# Altium PCB LocalKill.PcbDoc
Units mil, origin at the board's own origin, x right, y up, seen from the top; angles counter-clockwise.
Board outline 5000 x 3500 mil, 4 copper layers (Top Layer, Internal Plane 1, Internal Plane 2, Bottom Layer), stack 30.634 mil thick; 115 components, 100 nets, 403 pads, 2 vias.
Unrouted connection lines stored in the file: 237.
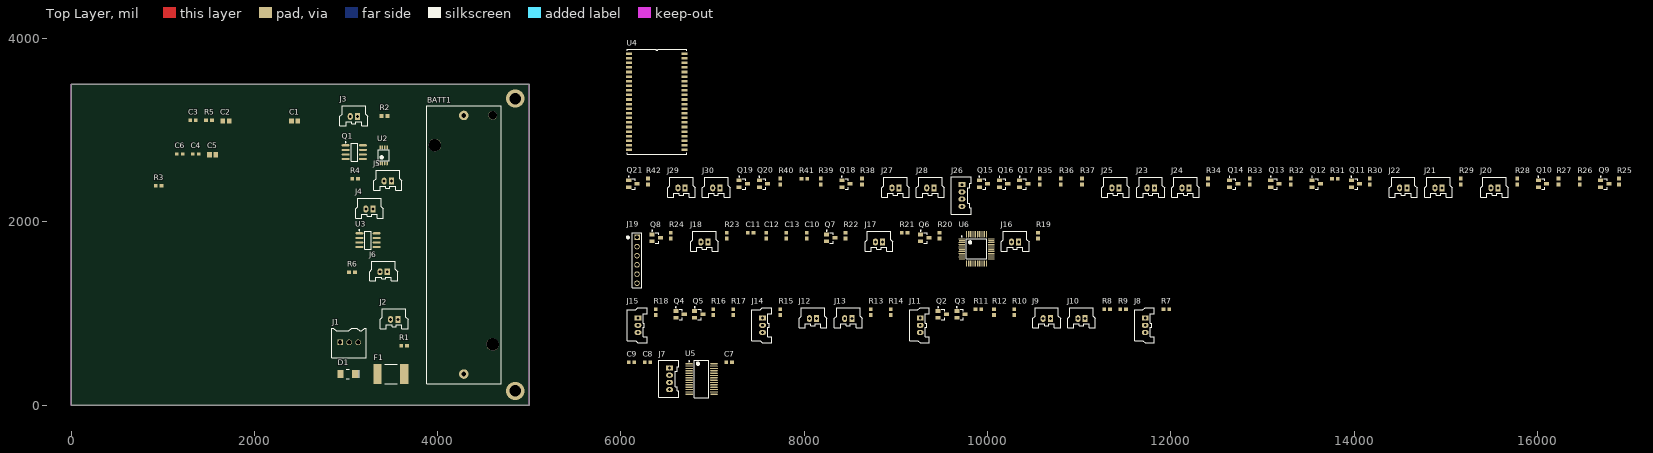
[diagram p0: Top Layer view]
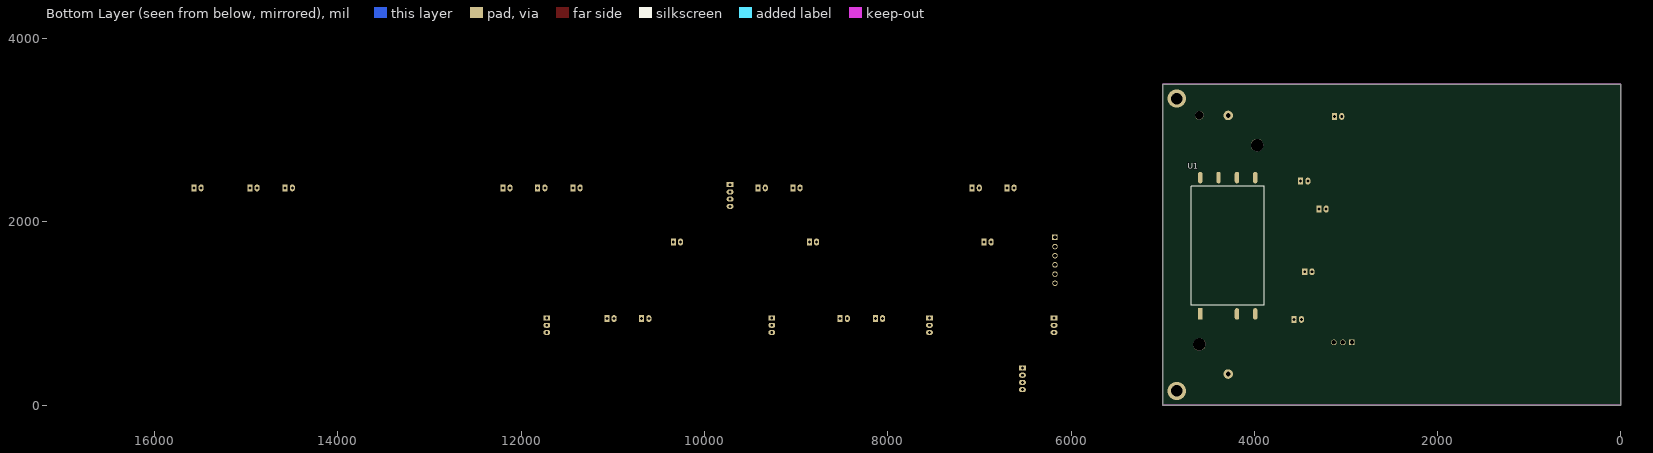
[diagram p1: Bottom Layer view, seen from below]
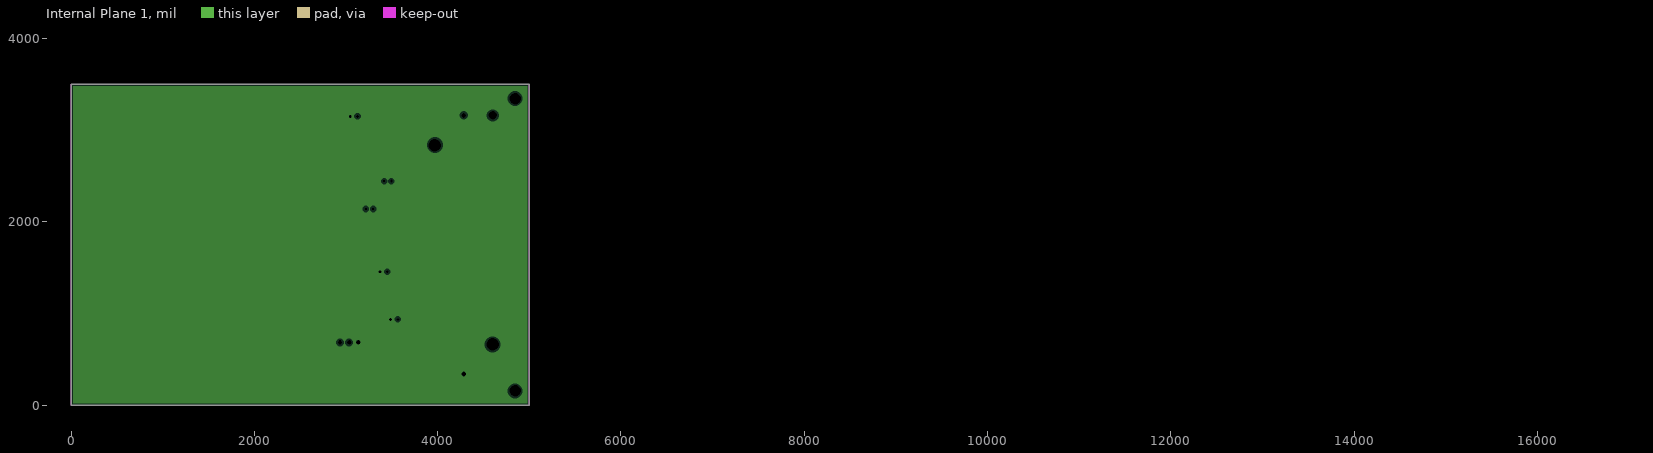
[diagram p2: Internal Plane 1, clearances drawn from the general rule]
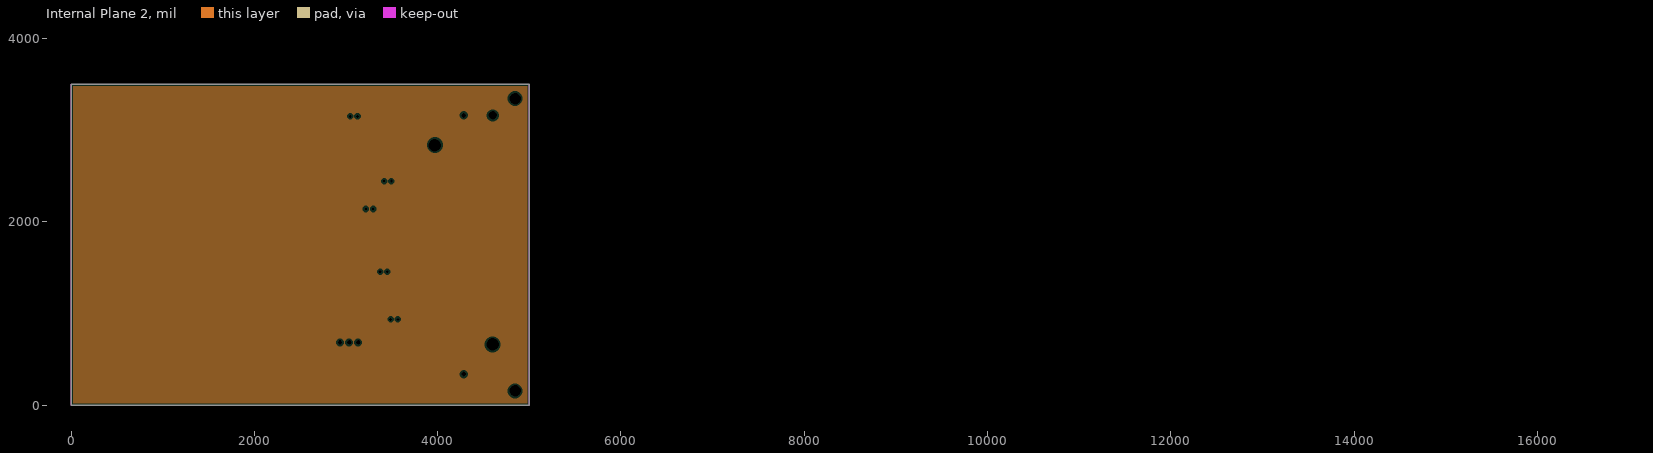
[diagram p3: Internal Plane 2, clearances drawn from the general rule]

## Layer stack, top to bottom
Top Solder: solder mask 0.4, Solder Resist, Dk 3.5
Top Layer: signal copper 1.4
Dielectric 1: core 10, FR-4, Dk 4.2
Internal Plane 1: plane copper 1.417, net GND
Dielectric 3: prepreg 5, Dk 4.2
Internal Plane 2: plane copper 1.417, net 3V3
Dielectric 2: core 10, Dk 4.2
Bottom Layer: signal copper 1.4
Bottom Solder: solder mask 0.4, Solder Resist, Dk 3.5

## Board outline
0,0 5000,0 5000,3500 0,3500

## Design rules (kind name [scope] priority, off if disabled: settings)
Clearance [All] p1: gap=7
PlaneClearance [All] p1: clearance=20
PlaneConnect [All] p1: planeconnectstyle=Relief reliefexpansion=20 reliefentries=4 reliefconductorwidth=10 reliefairgap=10
PolygonConnect [All] p1: connectstyle=Relief reliefconductorwidth=10 reliefentries=4 polygonreliefangle="90 Angle" airgapwidth=10
RoomDefinition RF [InComponentClass('RF')] p1: confinementstyle=ConfineIn formatcopy=TRUE lockcomponents=FALSE outline 6045,2725 6740,2725 6740,3995 6045,3995
RoomDefinition Power [InComponentClass('Power')] p2: confinementstyle=ConfineIn formatcopy=TRUE lockcomponents=FALSE outline 860,0 5000,0 5000,3500 860,3500
RoomDefinition Output [InComponentClass('Output')] p3: confinementstyle=ConfineIn formatcopy=TRUE lockcomponents=FALSE outline 6045,2065 17045,2065 17045,2610 6045,2610
RoomDefinition MCU [InComponentClass('MCU')] p4: confinementstyle=ConfineIn formatcopy=TRUE lockcomponents=FALSE outline 6045,1240 10695,1240 10695,2020 6045,2020
RoomDefinition Input [InComponentClass('Input')] p5: confinementstyle=ConfineIn formatcopy=TRUE lockcomponents=FALSE outline 6045,660 12020,660 12020,1185 6045,1185
RoomDefinition FTDI [InComponentClass('FTDI')] p6: confinementstyle=ConfineIn formatcopy=TRUE lockcomponents=FALSE outline 6045,60 7250,60 7250,610 6045,610
RoutingVias [All] p1: holewidth=28 width=50 viastyle="Through Hole" minholewidth=28 minwidth=50 maxholewidth=28 maxwidth=50
SolderMaskExpansion [All] p1: expansion=4
Width [All] p1: maxlimit=10 minlimit=10 preferedwidth=10
28 further rules are at their usual default settings.

## Classes and differential pairs
component class RF: U4
component class Power: BATT1 C1 C2 C3 C4 C5 C6 D1 F1 J1 J2 J3 J4 J5 J6 Q1 R1 R2 R3 R4 R5 R6 U1 U2 U3
component class Output: J20 J21 J22 J23 J24 J25 J26 J27 J28 J29 J30 Q9 Q10 Q11 Q12 Q13 Q14 Q15 Q16 Q17 Q18 Q19 Q20 Q21 R25 R26 R27 R28 R29 R30 R31 R32 R33 R34 R35 R36 R37 R38 R39 R40 R41 R42
component class MCU: C10 C11 C12 C13 J16 J17 J18 J19 Q6 Q7 Q8 R19 R20 R21 R22 R23 R24 U6
component class Input: J8 J9 J10 J11 J12 J13 J14 J15 Q2 Q3 Q4 Q5 R7 R8 R9 R10 R11 R12 R13 R14 R15 R16 R17 R18
component class FTDI: C7 C8 C9 J7 U5

## Components (designator, comment, footprint, x,y, rotation, side; value= is the part's Value field where it differs from the comment)
BATT1 "1043P" 1043P 4285,1750 r90 top
C1 "Cap" CAPC0805 2440,3100 r0 top
C2 "Cap" CAPC0805 1690,3100 r0 top
C3 "Cap" CAPC0603 1330,3110 r0 top
C4 "Cap" CAPC0603 1360,2740 r0 top
C5 "Cap" CAPC0805 1545,2730 r0 top
C6 "Cap" CAPC0603 1185,2740 r0 top
C7 "Cap" CAPC0603 7180,470 r0 top
C8 "Cap" CAPC0603 6290,470 r0 top
C9 "Cap" CAPC0603 6115,470 r0 top
C10 "Cap" CAPC0603 8025,1850 r90 top
C11 "Cap" CAPC0603 7415,1880 r0 top
C12 "Cap" CAPC0603 7585,1850 r90 top
C13 "Cap" CAPC0603 7805,1850 r90 top
D1 "VS-15MQ040NTRPBF" SS110-TP 3020,340 r180 top
F1 "PTC Fuse" PTC7451X11N 3490,340 r180 top
J1 "24V IN" MCV_0,5/3-G-2,5 2935,685 r0 top
J2 "24V OK" MOLEX-HDR-1X2-SHERLOCK-VERT 3565,935 r0 top
J3 "5V OK" MOLEX-HDR-1X2-SHERLOCK-VERT 3125,3150 r0 top
J4 "PWR SW" MOLEX-HDR-1X2-SHERLOCK-VERT 3295,2140 r0 top
J5 "CHG STAT" MOLEX-HDR-1X2-SHERLOCK-VERT 3495,2445 r0 top
J6 "3V3 OK" MOLEX-HDR-1X2-SHERLOCK-VERT 3450,1455 r0 top
J7 "USB" MOLEX-HDR-1X4-SHERLOCK-VERT 6530,405 r90 top
J8 "PORT F KILL" MOLEX-HDR-1X3-SHERLOCK-VERT 11720,950 r90 top
J9 "PORT F KILL IND" MOLEX-HDR-1X2-SHERLOCK-VERT 10685,945 r0 top
J10 "STBD F KILL IND" MOLEX-HDR-1X2-SHERLOCK-VERT 11065,945 r0 top
J11 "PORT A KILL" MOLEX-HDR-1X3-SHERLOCK-VERT 9265,950 r90 top
J12 "PORT A KILL IND" MOLEX-HDR-1X2-SHERLOCK-VERT 8135,945 r0 top
J13 "STBD A KILL IND" MOLEX-HDR-1X2-SHERLOCK-VERT 8520,945 r0 top
J14 "STBD F KILL" MOLEX-HDR-1X3-SHERLOCK-VERT 7545,950 r90 top
J15 "STBD A KILL" MOLEX-HDR-1X3-SHERLOCK-VERT 6185,950 r90 top
J16 "SYS STAT IND" MOLEX-HDR-1X2-SHERLOCK-VERT 10340,1780 r0 top
J17 "REM STAT IND" MOLEX-HDR-1X2-SHERLOCK-VERT 8855,1780 r0 top
J18 "REM KILL IND" MOLEX-HDR-1X2-SHERLOCK-VERT 6950,1780 r0 top
J19 "SWD" SWD_STM32 6175,1830 r0 top
J20 "KILL IND" MOLEX-HDR-1X2-SHERLOCK-VERT 15570,2370 r0 top
J21 "RED IND" MOLEX-HDR-1X2-SHERLOCK-VERT 14960,2370 r0 top
J22 "HORN IND" MOLEX-HDR-1X2-SHERLOCK-VERT 14575,2370 r0 top
J23 "PORT F RELAY" MOLEX-HDR-1X2-SHERLOCK-VERT 11820,2370 r0 top
J24 "STBD F RELAY" MOLEX-HDR-1X2-SHERLOCK-VERT 12200,2370 r0 top
J25 "YELLOW IND" MOLEX-HDR-1X2-SHERLOCK-VERT 11435,2370 r0 top
J26 "STACK LIGHT" MOLEX-HDR-1X4-SHERLOCK-VERT 9720,2405 r90 top
J27 "PORT A RELAY" MOLEX-HDR-1X2-SHERLOCK-VERT 9035,2370 r0 top
J28 "STBD A RELAY" MOLEX-HDR-1X2-SHERLOCK-VERT 9415,2370 r0 top
J29 "GREEN IND" MOLEX-HDR-1X2-SHERLOCK-VERT 6700,2370 r0 top
J30 "HORN RELAY" MOLEX-HDR-1X2-SHERLOCK-VERT 7080,2370 r0 top
Q1 "NDS8434" NDS8434 3090,2760 r0 top
Q2 "MMBT3904" MMBT3904 9505,990 r0 top
Q3 "MMBT3904" MMBT3904 9710,990 r0 top
Q4 "MMBT3904" MMBT3904 6645,990 r0 top
Q5 "MMBT3904" MMBT3904 6850,990 r0 top
Q6 "MMBT3904" MMBT3904 9315,1825 r0 top
Q7 "MMBT3904" MMBT3904 8290,1825 r0 top
Q8 "MMBT3904" MMBT3904 6385,1825 r0 top
Q9 "MMBT3904" MMBT3904 16735,2415 r0 top
Q10 "MMBT3904" MMBT3904 16055,2415 r0 top
Q11 "MMBT3904" MMBT3904 14015,2415 r0 top
Q12 "MMBT3904" MMBT3904 13585,2415 r0 top
Q13 "MMBT3904" MMBT3904 13135,2415 r0 top
Q14 "MMBT3904" MMBT3904 12685,2415 r0 top
Q15 "MMBT3904" MMBT3904 9955,2415 r0 top
Q16 "MMBT3904" MMBT3904 10175,2415 r0 top
Q17 "MMBT3904" MMBT3904 10395,2415 r0 top
Q18 "MMBT3904" MMBT3904 8455,2415 r0 top
Q19 "MMBT3904" MMBT3904 7335,2415 r0 top
Q20 "MMBT3904" MMBT3904 7555,2415 r0 top
Q21 "MMBT3904" MMBT3904 6130,2415 r0 top
R1 "Res" RES0603 3635,650 r0 top
R2 "Res" RES0603 3420,3155 r0 top
R3 "Res" RES0603 955,2392.5 r0 top
R4 "Res" RES0603 3100,2470 r0 top
R5 "Res" RES0603 1505,3110 r0 top
R6 "Res" RES0603 3065,1450 r0 top
R7 "Res" RES0603 11950,1045 r0 top
R8 "Res" RES0603 11305,1045 r0 top
R9 "Res" RES0603 11480,1045 r0 top
R10 "Res" RES0603 10290,1015 r90 top
R11 "Res" RES0603 9900,1045 r0 top
R12 "Res" RES0603 10070,1015 r90 top
R13 "Res" RES0603 8725,1015 r90 top
R14 "Res" RES0603 8945,1015 r90 top
R15 "Res" RES0603 7740,1015 r90 top
R16 "Res" RES0603 7005,1015 r90 top
R17 "Res" RES0603 7225,1015 r90 top
R18 "Res" RES0603 6380,1015 r90 top
R19 "Res" RES0603 10550,1850 r90 top
R20 "Res" RES0603 9475,1850 r90 top
R21 "Res" RES0603 9095,1880 r0 top
R22 "Res" RES0603 8450,1850 r90 top
R23 "Res" RES0603 7155,1850 r90 top
R24 "Res" RES0603 6545,1850 r90 top
R25 "Res" RES0603 16890,2440 r90 top
R26 "Res" RES0603 16460,2440 r90 top
R27 "Res" RES0603 16230,2440 r90 top
R28 "Res" RES0603 15780,2440 r90 top
R29 "Res" RES0603 15165,2440 r90 top
R30 "Res" RES0603 14170,2440 r90 top
R31 "Res" RES0603 13790,2470 r0 top
R32 "Res" RES0603 13310,2440 r90 top
R33 "Res" RES0603 12860,2440 r90 top
R34 "Res" RES0603 12405,2440 r90 top
R35 "Res" RES0603 10570,2440 r90 top
R36 "Res" RES0603 10800,2440 r90 top
R37 "Res" RES0603 11030,2440 r90 top
R38 "Res" RES0603 8630,2440 r90 top
R39 "Res" RES0603 8180,2440 r90 top
R40 "Res" RES0603 7740,2440 r90 top
R41 "Res" RES0603 8000,2470 r0 top
R42 "Res" RES0603 6295,2440 r90 top
U1 "CC10-2405SR-E" CC10-2405SR-E 4590,995 r90 bottom
U2 "MCP73843-4.2" MSOP-8N 3410,2725 r90 top
U3 "LT1763-3.3" 8-SOIC 3240,1800 r0 top
U4 "TRM-900-NT" TRM-900-NT 6090,3835 r0 top
U5 "FT232RL" SSOP_28_N 6880,285 r0 top
U6 "STM32F072CB" STM32F072CB 9880,1705 r0 top

## Footprints (in the part's own frame and the unit in brackets; to place one, negate y for a bottom-side part, rotate by r counter-clockwise, add the part's x,y. Pads: shape width x height; smd on the part's side, far side on the other; paste and mask are expansions set on the pad)
8-SOIC [mm] "Used for LMH6612"
  oval 2.2x0.6 smd: 1(-2.4,1.905) 2(-2.4,0.635) 3(-2.4,-0.635) 4(-2.4,-1.905) 5(2.4,-1.905) 6(2.4,-0.635) 7(2.4,0.635) 8(2.4,1.905)
  silkscreen extent -2.52,-2.5 0.9,2.88, body extent -2,-2.5 2,2.5, height 1.75
1043P [mil] "HOLDER FOR 18650 BATTERY"
  round 104 hole 52: 1(1411,0) 2(-1411,0)
  round 136 hole 136 unplated: 3(-1087.5,-315) 4(1087.5,315)
  round 94 hole 94 unplated: 5(1411,-315)
  silkscreen extent -1518,-407 1517,407, body extent -1519,-408 1515,405, height 585
CAPC0603 [mm] "Chip Capacitor, 2-Leads, Body 1.60x0.80mm, IPC Medium Density"
  rect 1x0.95 smd: 1(-0.8,0) 2(0.8,0)
  body extent -0.88,-0.48 0.87,0.48, height 0.8
CAPC0805 [mm] "Chip Capacitor, 2-Leads, Body 2.01x1.25mm, IPC Medium Density"
  rect 1.3x1.5 smd: 1(-0.875,0) 2(0.875,0)
  body extent -1.1,-0.72 1.11,0.72, height 1.8
CC10-2405SR-E [mm] "CONV DC/DC 10W SNGL 24V 5V SMD"
  rect 3.2x1.2 smd: 1(0,0)
  oval 3.2x1.2 smd: 2(0,-10.16) 3(0,-15.24) 4(37.8,-15.24) 5(37.8,-10.16) 6(37.8,-5.08) 7(37.8,0)
  silkscreen extent 2.43,-17.78 35.37,2.54, body extent -0.58,-18.87 38.28,3.73, height 6.9
MCV_0,5/3-G-2,5 [mil] "CONN TERM BLOCK 2.50MM 3POS"
  rect 60x60 hole 47.24: 1(0,0)
  round 60 hole 47.24: 2(98.43,0) 3(196.85,0)
  silkscreen extent -90,-167 286,156, body extent -87,-165 283,154, height 398
MMBT3904 [mm] "SOT23, 3-Leads, Body 2.92x2.40mm, Pitch 0.95mm, IPC Medium Density"
  rect 1.4x1 smd: B(-1.15,0.95) C(1.15,0) E(-1.15,-0.95)
  silkscreen extent -1.27,-1.45 0.65,2.12, body extent -0.65,-1.46 0.65,1.46, height 1.2
MOLEX-HDR-1X2-SHERLOCK-VERT [mm]
  rect 1.397x1.905 hole 0.8: 1(0,0)
  oval 1.397x1.905 hole 0.8: 2(-2,0)
  silkscreen extent -4.85,-2.55 2.85,2.95, body extent -4.87,-2.59 2.83,2.96, height 8.5
MOLEX-HDR-1X3-SHERLOCK-VERT [mm]
  rect 1.397x1.905 hole 0.8: 1(0,0)
  oval 1.397x1.905 hole 0.8: 2(-2,0) 3(-4,0)
  silkscreen extent -6.85,-2.55 2.85,2.95, body extent -6.88,-2.57 2.82,2.98, height 8.57
MOLEX-HDR-1X4-SHERLOCK-VERT [mm]
  rect 1.397x1.905 hole 0.8: 1(0,0)
  oval 1.397x1.905 hole 0.8: 2(-2,0) 3(-4,0) 4(-6,0)
  silkscreen extent -8.15,-2.55 2.15,2.95, body extent -8.13,-2.57 2.17,2.98, height 8.5
MSOP-8N [mm] "LT1767"
  oval 1.1x0.45 smd: 1(-2.2,0.975) 2(-2.2,0.325) 3(-2.2,-0.325) 4(-2.2,-0.975) 5(2.2,-0.975) 6(2.2,-0.325) 7(2.2,0.325) 8(2.2,0.975)
  silkscreen extent -2.32,-1.55 1.55,1.87, body extent -1.55,-1.55 1.55,1.55, height 1.1
NDS8434 [mm] "MOSFET P-CH 20V 6.5A 8-SOIC"
  oval 2.2x0.6 smd: D(-2.4,-1.905) D(-2.4,-0.635) D(-2.4,0.635) D(-2.4,1.905) G(2.4,1.905) S(2.4,-1.905) S(2.4,-0.635) S(2.4,0.635)
  silkscreen extent -2.52,-2.5 0.9,2.88, body extent -2,-2.5 2,2.5, height 1.75
PTC7451X11N [mm] "Chip PTC, 2920, 7351 metric 2-Leads, Body 7.36x5.12mm, IPC Medium Density"
  rect 2.3x5.6 smd: 1(-3.7,0) 2(3.7,0)
  silkscreen extent -1.75,-2.7 1.75,2.7, body extent -3.99,-2.72 3.99,2.72, height 1.15
RES0603 [mm] "Chip Resistor, 2-Leads, Body 1.60x0.80mm, IPC Medium Density"
  rect 1.05x1 smd: 1(-0.8,0) 2(0.8,0)
  body extent -0.88,-0.48 0.87,0.47, height 0.8
SS110-TP [mil] "DIODE SCHOTTKY 100V 1A SMA"
  rect 70x85 smd: A(80,0) C(-80,0)
  silkscreen extent -127,-53 18,53, body extent -84,-52 84,52, height 116
SSOP_28_N [mm] "For FT232RL-Tube"
  oval 2.1x0.35 smd: 1(-3.475,4.225) 2(-3.475,3.575) 3(-3.475,2.925) 4(-3.475,2.275) 5(-3.475,1.625) 6(-3.475,0.975) 7(-3.475,0.325) 8(-3.475,-0.325) 9(-3.475,-0.975) 10(-3.475,-1.625) 11(-3.475,-2.275) 12(-3.475,-2.925) 13(-3.475,-3.575) 14(-3.475,-4.225) 15(3.425,-4.225) 16(3.425,-3.575) 17(3.425,-2.925) 18(3.425,-2.275) 19(3.425,-1.625) 20(3.425,-0.975) 21(3.425,-0.325) 22(3.425,0.325) 23(3.425,0.975) 24(3.425,1.625) 25(3.425,2.275) 26(3.425,2.925) 27(3.425,3.575) 28(3.425,4.225)
  silkscreen extent -3.6,-5.25 1.97,5.25, body extent -2.83,-5.25 2.77,5.25, height 2
STM32F072CB [mm] "TSQFP, 48-Leads, Body 7.00x7.00mm, Pitch 0.50mm, IPC Medium Density"
  oval 1.75x0.3 smd: 1(-4.075,2.75) 2(-4.075,2.25) 3(-4.075,1.75) 4(-4.075,1.25) 5(-4.075,0.75) 6(-4.075,0.25) 7(-4.075,-0.25) 8(-4.075,-0.75) 9(-4.075,-1.25) 10(-4.075,-1.75) 11(-4.075,-2.25) 12(-4.075,-2.75) 25(4.075,-2.75) 26(4.075,-2.25) 27(4.075,-1.75) 28(4.075,-1.25) 29(4.075,-0.75) 30(4.075,-0.25) 31(4.075,0.25) 32(4.075,0.75) 33(4.075,1.25) 34(4.075,1.75) 35(4.075,2.25) 36(4.075,2.75)
  oval 0.3x1.75 smd: 13(-2.75,-4.075) 14(-2.25,-4.075) 15(-1.75,-4.075) 16(-1.25,-4.075) 17(-0.75,-4.075) 18(-0.25,-4.075) 19(0.25,-4.075) 20(0.75,-4.075) 21(1.25,-4.075) 22(1.75,-4.075) 23(2.25,-4.075) 24(2.75,-4.075) 37(2.75,4.075) 38(2.25,4.075) 39(1.75,4.075) 40(1.25,4.075) 41(0.75,4.075) 42(0.25,4.075) 43(-0.25,4.075) 44(-0.75,4.075) 45(-1.25,4.075) 46(-1.75,4.075) 47(-2.25,4.075) 48(-2.75,4.075)
  silkscreen extent -4.2,-2.8 2.8,3.57, body extent -3.5,-3.5 3.5,3.5, height 1.6
SWD_STM32 [mil] "SWD connector matching the pinout on STM Discovery Boards"
  rect 60x60 hole 39.37: 1(0,0)
  round 60 hole 39.37: 2(0,-100) 3(0,-200) 4(0,-300) 5(0,-400) 6(0,-500)
  silkscreen extent -110,-550 50,50
TRM-900-NT [mil] "RF TXRX MODULE ISM<1GHZ"
  rect 65x28 smd: 1(0,0) 2(0,-50) 3(0,-100) 4(0,-150) 5(0,-200) 6(0,-250) 7(0,-300) 8(0,-350) 9(0,-400) 10(0,-450) 11(0,-500) 12(0,-550) 13(0,-600) 14(0,-650) 15(0,-700) 16(0,-750) 17(0,-800) 18(0,-850) 19(0,-900) 20(0,-950) 21(0,-1000) 22(0,-1050) 23(605,-1050) 24(605,-1000) 25(605,-950) 26(605,-900) 27(605,-850) 28(605,-800) 29(605,-750) 30(605,-700) 31(605,-650) 32(605,-600) 33(605,-550) 34(605,-500) 35(605,-450) 36(605,-400) 37(605,-350) 38(605,-300) 39(605,-250) 40(605,-200) 41(605,-150) 42(605,-100) 43(605,-50) 44(605,0)
  silkscreen extent -20,-1100 625,50

## Part data
BATT1: "HOLDER FOR 18650 BATTERY"
D1: "DIODE SCHOTTKY 40V 1.5A SMA"
F1: library part PTC_Fuse
J1: library part MCV_0,5/3-G-2,5, "CONN TERM BLOCK 2.50MM 3POS, Vertical, Through-Hole, 4A"
J2 J3 J4 J5 J6 J9 J10 J12 J13 J16 J17 J18 J20 J21 J22 J23 J24 J25 J27 J28 J29 J30: library part MOLEX-HDR-1x2-SHERLOCK_VERT, "Header, Molex, 2mm Pitch Sherlock Header, Single Row, Vertical, 2 Circuits, Length 3.3mm, 0353620250"
J7 J26: library part MOLEX-HDR-1x4-SHERLOCK_VERT, "Header, Molex, 2mm Pitch Sherlock Header, Single Row, Vertical, 4 Circuits, Length 3.3mm, 0353620450"
J8 J11 J14 J15: library part MOLEX-HDR-1x3-SHERLOCK_VERT, "Header, Molex, 2mm Pitch Sherlock Header, Single Row, Vertical, 3 Circuits, Length 3.3mm, 0353620376"
J19: library part SWD_STM32, "SWD connector matching the pinout on STM Discovery Boards"
Q1: "MOSFET P-CH 20V 6.5A 8-SOIC"
Q2 Q3 Q4 Q5 Q6 Q7 Q8 Q9 Q10 Q11 Q12 Q13 Q14 Q15 Q16 Q17 Q18 Q19 Q20 Q21: "TRANS NPN 40V 0.2A SOT-23"
U1: "CONV DC/DC 10W SNGL 24V 5V SMD"
U2: "IC CONTROLLER LI-ION 4.2V 8MSOP"
U3: "IC REG LDO 3.3V 0.5A 8SOIC"
U4: "RF TXRX MODULE ISM<1GHZ"
U5: "IC USB FS SERIAL UART 28-SSOP"
U6: "MCU 32BIT 128KB FLASH 48LQFP"

## Via types
v1: diameter 200, hole 125, Top Layer to Bottom Layer, 2 vias

## Nets (pads, with @x,y where several pads share a name; then routed paths per layer and width w, separated by ;. In a path a pad name is that pad's centre, name@x,y a point inside that pad or via, vN(x,y) a via of type N, cw(c..) or ccw(c..) an arc to the next point about the centre after c; other vN are vias at no path point)
3V3: C5.1 C6.1 C7.1 C10.1 C11.1 C12.1 C13.1 J19.1 R6.1 R7.1 R8.1 R9.1 R10.1 R13.1 R14.1 R15.1 R18.1 R19.1 R21.1 R23.1 R26.1 R28.1 R29.1 R34.1 R39.1 U3.1 U3.2 U4.24 U4.25 U4.31 U5.4 U6.1 U6.9 U6.24 U6.36 U6.48
5V: C1.1 R2.1 R3.1 R4.2 R5.1 U1.7 U2.2
24V: F1.1 J23.1 J24.1 J26.1 J27.1 J28.1 J30.1 R1.1 U1.1
BATT: C4.1 J4.1 U3.5 U3.8
"COMM STAT": R22.1 U6.19
FTDI_IN: U5.5 U6.12
FTDI_OUT: U5.1 U6.13
GND: BATT1.2 C1.2 C2.2 C3.2 C4.2 C5.2 C7.2 C8.2 C9.2 C10.2 C11.2 C12.2 C13.2 J1.3 J2.2 J3.2 J6.2 J7.4 J8.3 J11.3 J14.3 J15.3 J19.3 Q2.E Q3.E Q4.E Q5.E Q6.E Q7.E Q8.E Q9.E Q10.E Q11.E Q12.E Q13.E Q14.E Q15.E Q16.E Q17.E Q18.E Q19.E Q20.E Q21.E U1.3 U1.5 U2.6 U3.3 U3.6 U3.7 U4.1 U4.3 U4.6 U4.9 U4.11 U4.17 U4.22 U4.23 U4.26 U4.28 U4.34 U4.39 U4.42 U4.44 U5.7 U5.18 U5.21 U5.25 U5.26 U6.8 U6.23 U6.35 U6.44 U6.47
GREEN: R38.1 R42.1 U6.25
GREEN_LT: J26.4 Q18.C
HORN: R27.1 R32.1 U6.46
HORN_RELAY: J30.2 Q10.C
KILL: R30.1 R36.1 R37.1 R40.1 R41.1 U6.45
NetBATT1_1: BATT1.1 C2.1 J4.2 Q1.D U2.7
NetC3_1: C3.1 U2.5
NetC6_2: C6.2 U3.4
NetC9_1: C9.1 U5.17
NetD1_A: D1.A J1.1
NetD1_C: D1.C F1.2
NetJ2_1: J2.1 R1.2
NetJ3_1: J3.1 R2.2
NetJ5_1: J5.1 R4.1
NetJ5_2: J5.2 U2.3
NetJ6_1: J6.1 R6.2
NetJ9_1: J9.1 R8.2
NetJ9_2: J9.2 Q2.C
NetJ10_1: J10.1 R9.2
NetJ10_2: J10.2 Q3.C
NetJ12_1: J12.1 R13.2
NetJ12_2: J12.2 Q4.C
NetJ13_1: J13.1 R14.2
NetJ13_2: J13.2 Q5.C
NetJ16_1: J16.1 R19.2
NetJ16_2: J16.2 Q6.C
NetJ17_1: J17.1 R21.2
NetJ17_2: J17.2 Q7.C
NetJ18_1: J18.1 R23.2
NetJ18_2: J18.2 Q8.C
NetJ20_1: J20.1 R26.2
NetJ20_2: J20.2 Q11.C
NetJ21_1: J21.1 R28.2
NetJ21_2: J21.2 Q12.C
NetJ22_1: J22.1 R29.2
NetJ22_2: J22.2 Q13.C
NetJ23_2: J23.2 Q16.C
NetJ24_2: J24.2 Q17.C
NetJ25_1: J25.1 R34.2
NetJ25_2: J25.2 Q15.C
NetJ27_2: J27.2 Q19.C
NetJ28_2: J28.2 Q20.C
NetJ29_1: J29.1 R39.2
NetJ29_2: J29.2 Q21.C
NetQ1_G: Q1.G U2.8
NetQ1_S: Q1.S R3.2 U2.1
NetQ2_B: Q2.B R11.2
NetQ3_B: Q3.B R12.2
NetQ4_B: Q4.B R16.2
NetQ5_B: Q5.B R17.2
NetQ6_B: Q6.B R20.2
NetQ7_B: Q7.B R22.2
NetQ8_B: Q8.B R24.2
NetQ9_B: Q9.B R25.2
NetQ10_B: Q10.B R27.2
NetQ11_B: Q11.B R30.2
NetQ12_B: Q12.B R31.2
NetQ13_B: Q13.B R32.2
NetQ14_B: Q14.B R33.2
NetQ15_B: Q15.B R35.2
NetQ16_B: Q16.B R36.2
NetQ17_B: Q17.B R37.2
NetQ18_B: Q18.B R38.2
NetQ19_B: Q19.B R40.2
NetQ20_B: Q20.B R41.2
NetQ21_B: Q21.B R42.2
NetR5_2: R5.2 U2.4
NRST: J19.5 U6.7
PORT_A_KILL_IND: R16.1 U6.15
PORT_A_KILL_SW: J11.1 R10.2 U6.40
PORT_F_KILL_IND: R11.1 U6.14
PORT_F_KILL_SW: J8.1 R7.2 U6.39
RADIO_IN: U4.27 U6.30
RADIO_OUT: U4.29 U6.31
RADIO_READY: U4.15 U6.33
RADIO_SEL: U4.30 U6.32
RED: R25.1 R31.1 U6.21
RED_LT: J26.2 Q9.C
"REM KILL": R24.1 U6.20
STBD_A_KILL_IND: R17.1 U6.17
STBD_A_KILL_SW: J15.1 R18.2 U6.42
STBD_F_KILL_IND: R12.1 U6.16
STBD_F_KILL_SW: J14.1 R15.2 U6.41
SWCLK: J19.2 U6.37
SWDIO: J19.4 U6.34
SWO: J19.6 U6.38
"SYS STAT": R20.1 U6.18
USB5V: C8.1 J7.1 U5.20
USB_N: J7.2 U5.16
USB_P: J7.3 U5.15
YELLOW: R33.1 R35.1 U6.22
YELLOW_LT: J26.3 Q14.C
pads on no net: BATT1.3 BATT1.4 BATT1.5 J1.2 J8.2 J11.2 J14.2 J15.2 U1.2 U1.4 U1.6 U4.2 U4.4 U4.5 U4.7 U4.8 U4.10 U4.12 U4.13 U4.14 U4.16 U4.18 U4.19 U4.20 U4.21 U4.32 U4.33 U4.35 U4.36 U4.37 U4.38 U4.40 U4.41 U4.43 U5.2 U5.3 U5.6 U5.8 U5.9 U5.10 U5.11 U5.12 U5.13 U5.14 U5.19 U5.22 U5.23 U5.24 U5.27 U5.28 U6.2 U6.3 U6.4 U6.5 U6.6 U6.10 U6.11 U6.26 U6.27 U6.28 U6.29 U6.43
copper on no net:
  other v1: 4845,155 4845,3345

## Polygon pours and split planes (outlines as drawn)
GND on Internal Plane 1 (split plane): 4979.9,20.1 20.1,20.1 20.1,3479.9 4979.9,3479.9
3V3 on Internal Plane 2 (split plane): 4979.9,20.1 20.1,20.1 20.1,3479.9 4979.9,3479.9

## Keep-outs
Keep-Out Layer:
  the board outline again, w10